# Altium PCB PCB1.PcbDoc
Units mil, origin at the board's own origin, x right, y up, seen from the top; angles counter-clockwise.
Board outline 2630.97 x 2630.97 mil, 2 copper layers (Top Layer, Bottom Layer); 25 components, 8 nets, 53 pads, 0 vias.
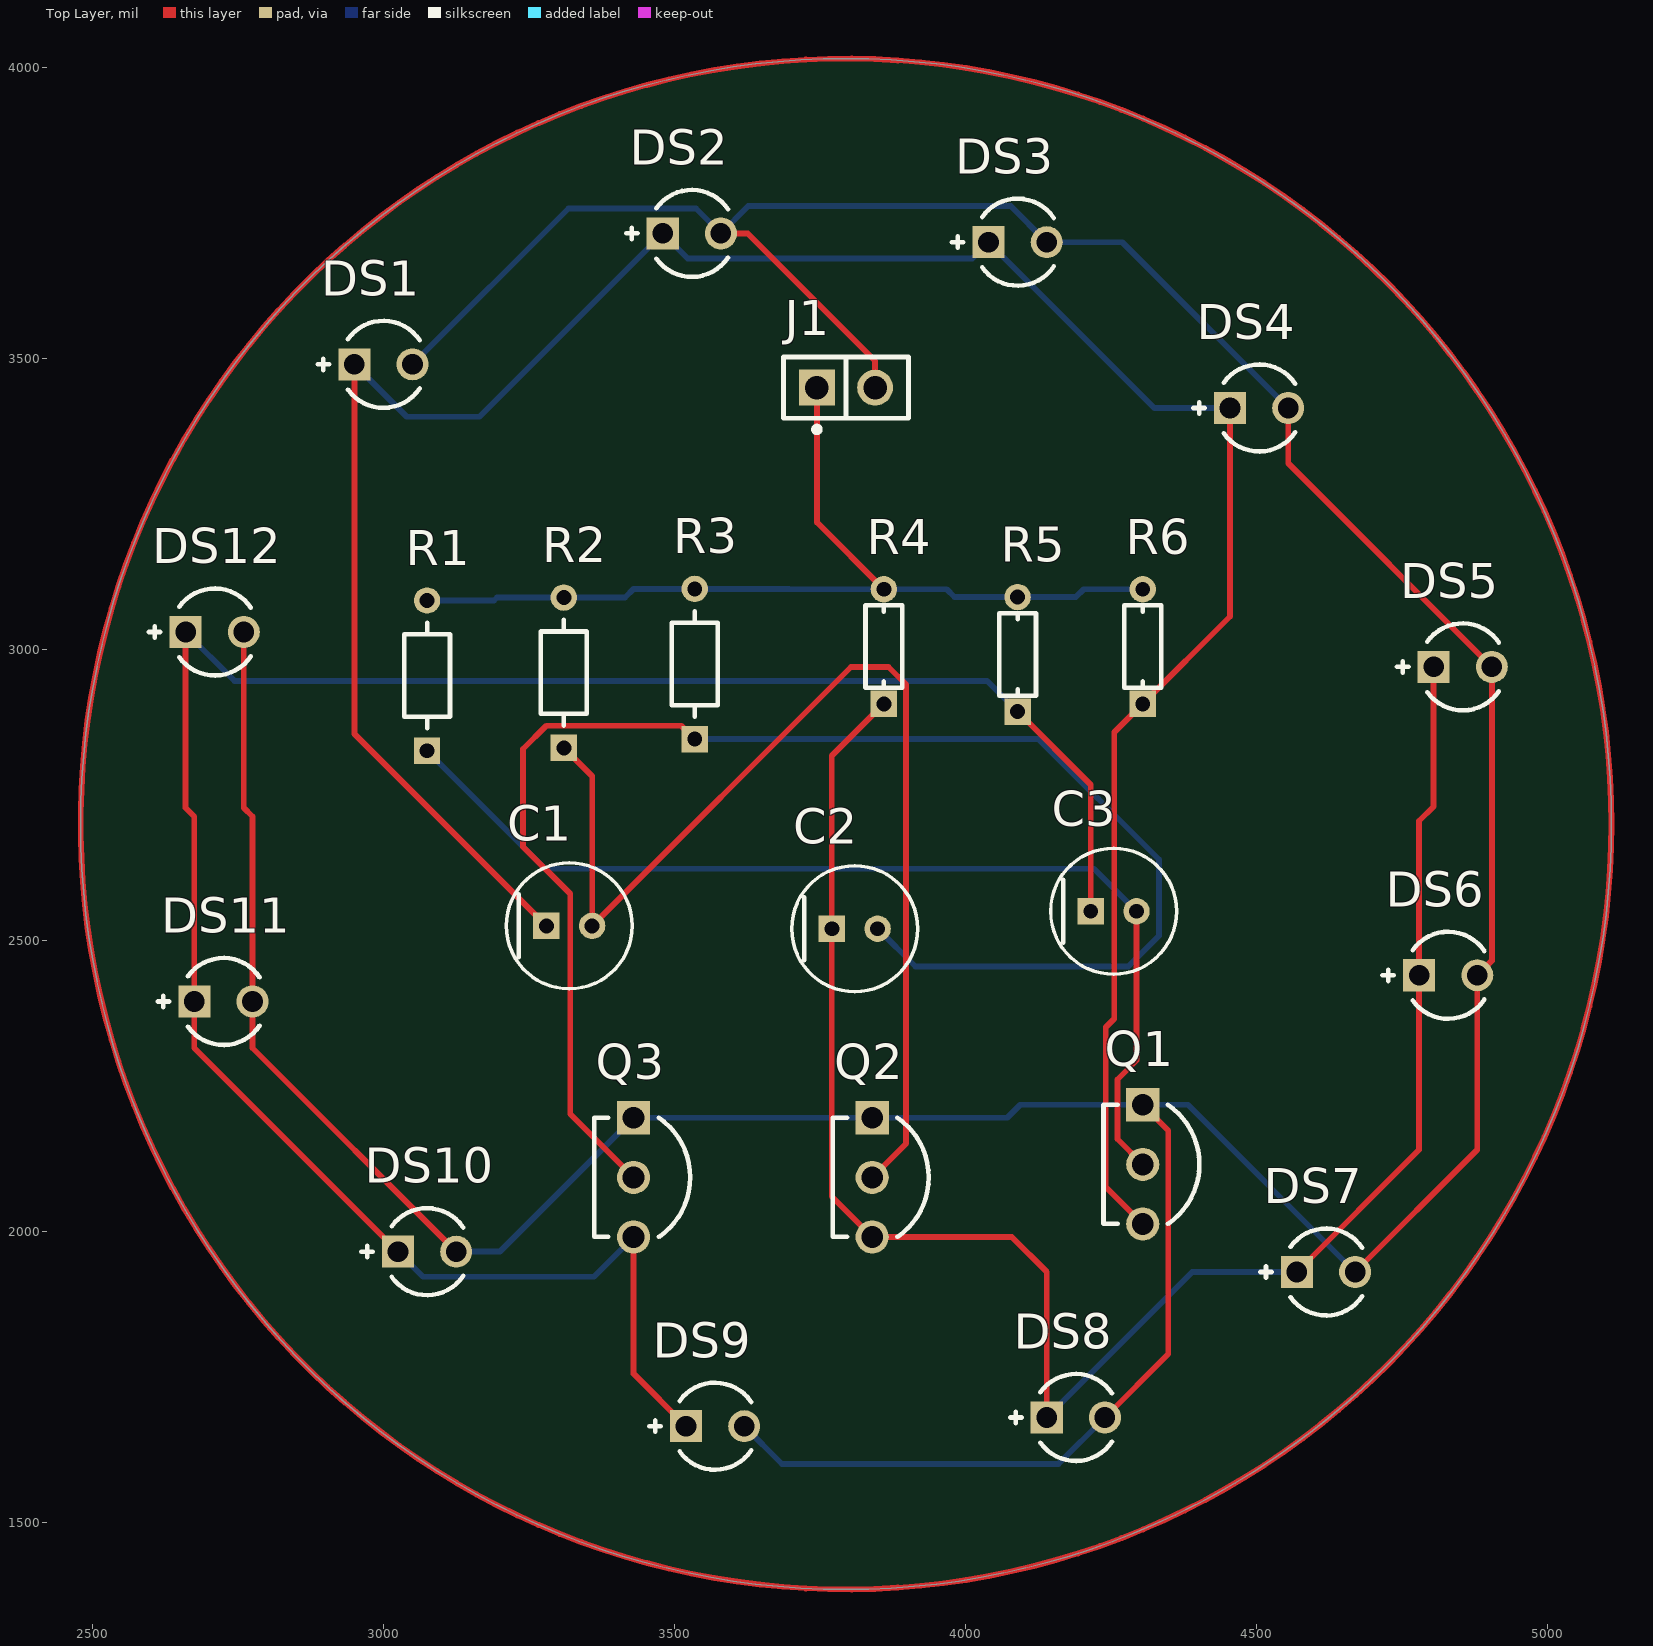
[diagram p0: Top Layer view]
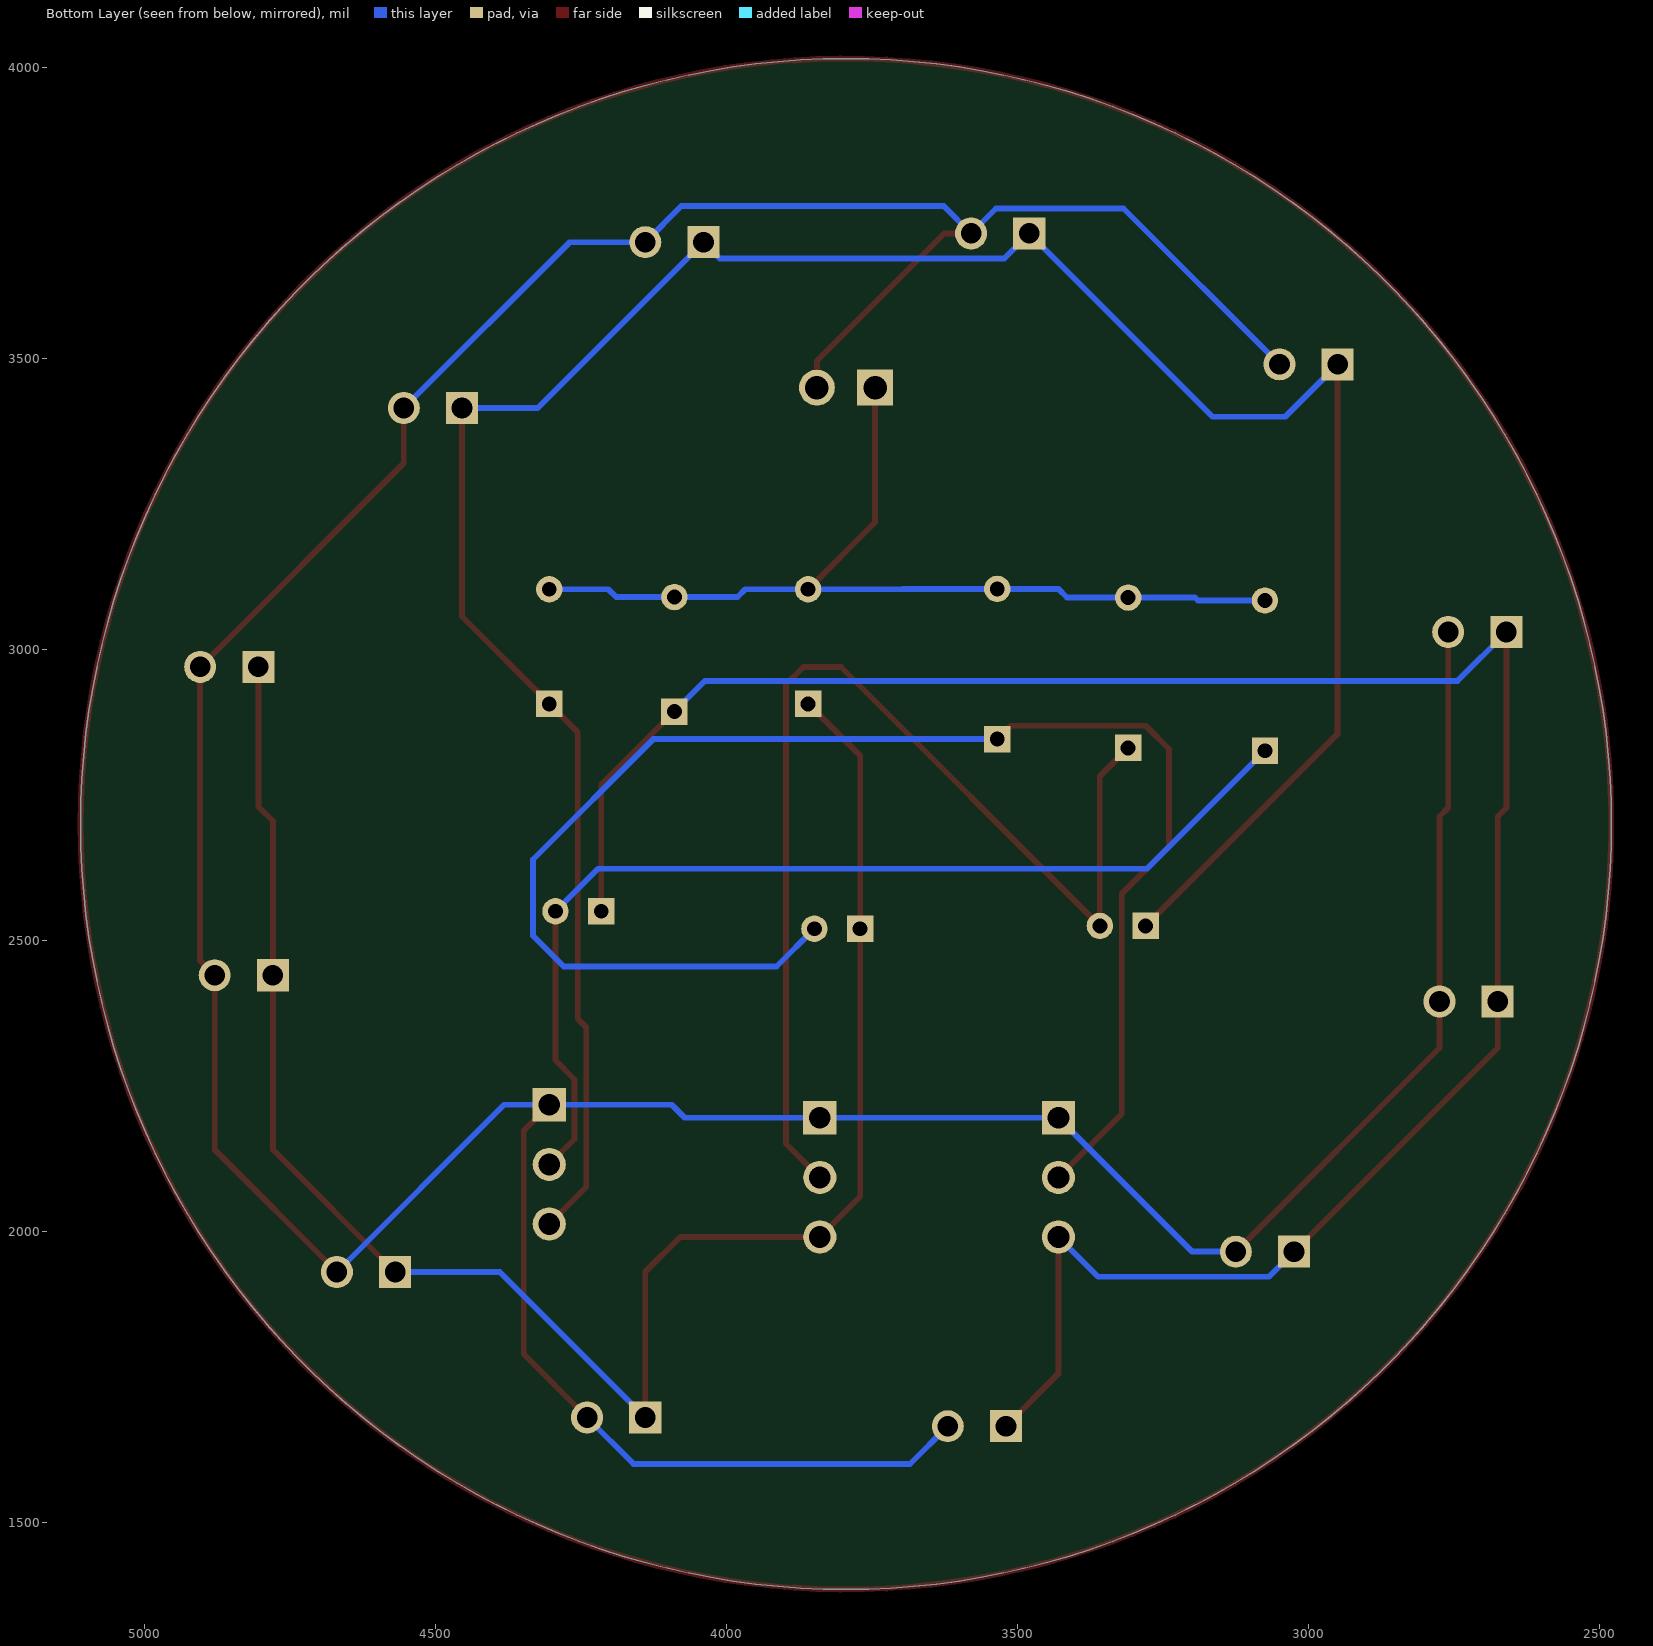
[diagram p1: Bottom Layer view, seen from below]
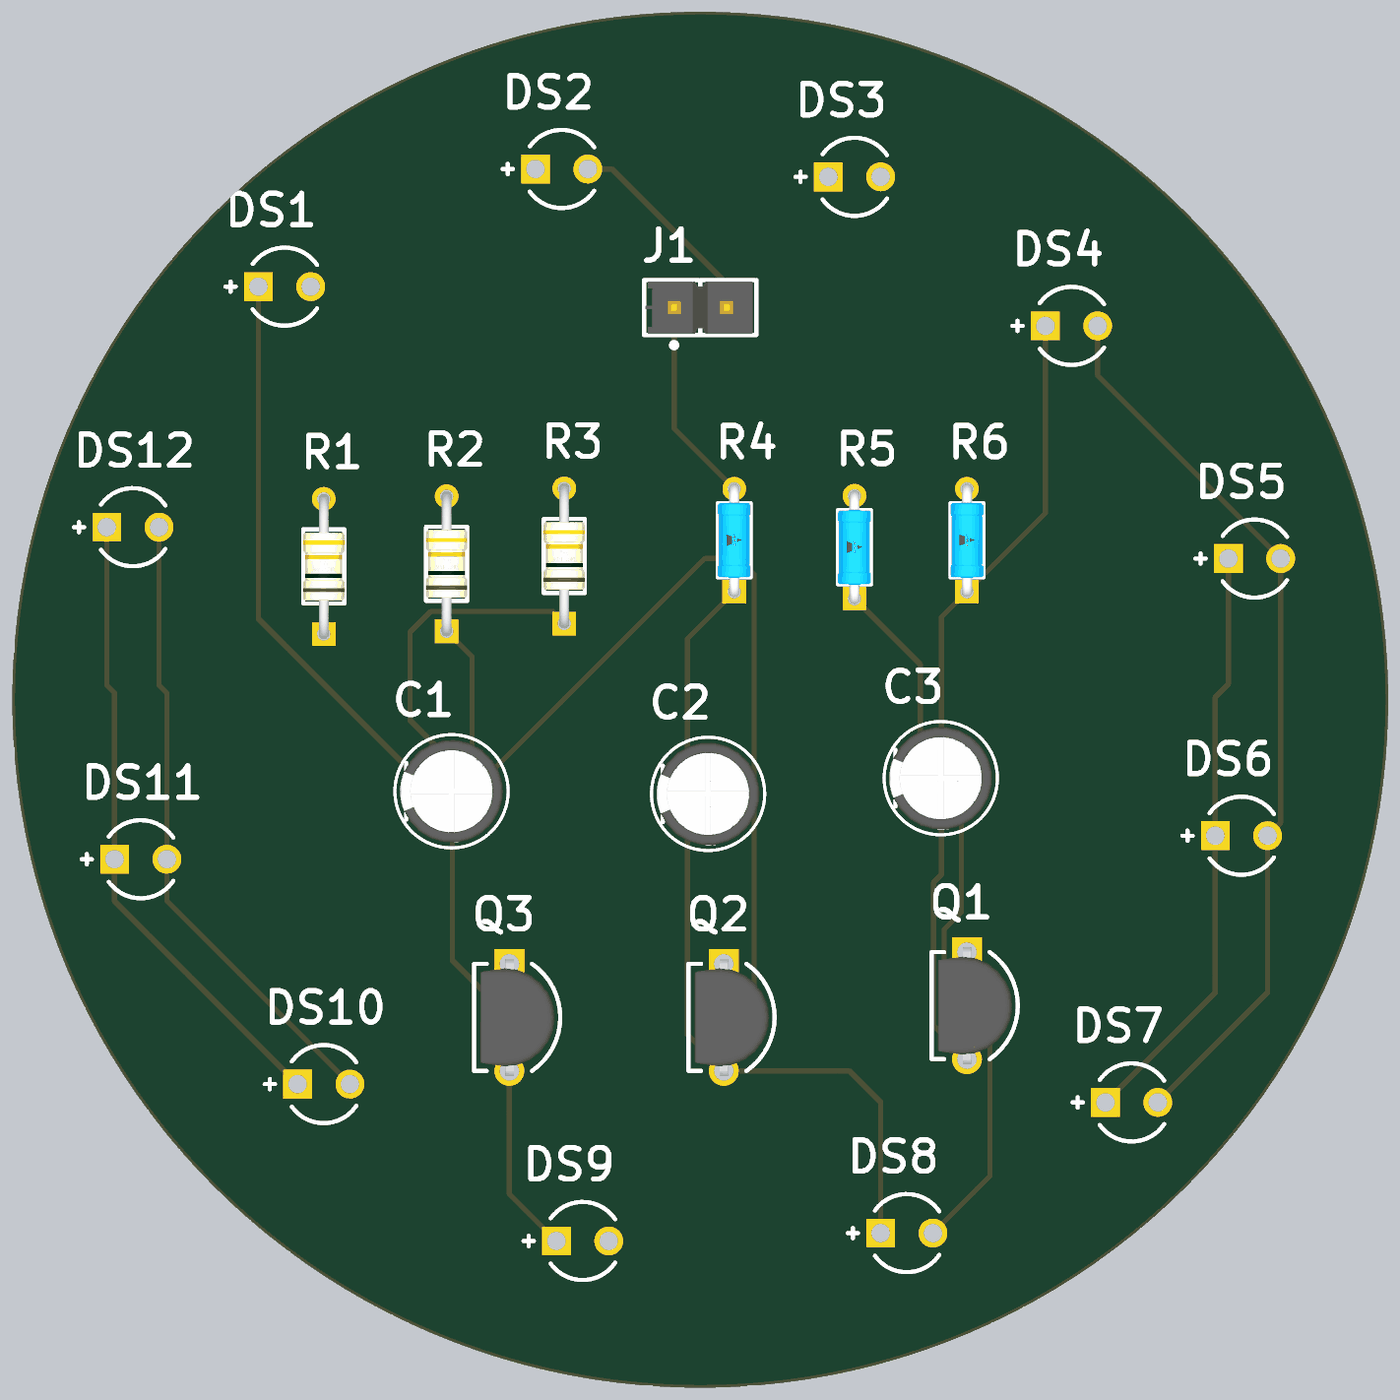
[diagram p2: 3D render of the assembled board from above, using the file's embedded part models]

## Layer stack, top to bottom
Top Solder: solder mask 0.4, Solder Resist, Dk 3.5
Top Layer: signal copper 1.4
Dielectric 1: dielectric 12.6, FR-4, Dk 4.8
Bottom Layer: signal copper 1.4
Bottom Solder: solder mask 0.4, Solder Resist, Dk 3.5

## Board outline
2479.52,2700 ccw(c3795,2700) 3795,1384.52 ccw(c3795,2700) 5110.48,2700 ccw(c3795,2700) 3795,4015.48 ccw(c3795,2700)

## Design rules (kind name [scope] priority, off if disabled: settings)
Clearance [All] p1: gap=10 ignorepadtopadclearanceinfootprint=FALSE
PolygonConnect [All] p1: connectstyle=Relief reliefconductorwidth=10 reliefentries=4 polygonreliefangle="90 Angle" airgapwidth=10
RoutingVias [All] p1: holewidth=28 width=50 viastyle="Through Hole" minholewidth=28 minwidth=50 maxholewidth=28 maxwidth=50
SolderMaskExpansion [All] p1: expansion=0 istentingtop=FALSE
SupplyNets "Schematic Supply Nets" [InNet('GND')] p1: voltage=0.000
Width [All] p1: maxlimit=10 minlimit=10 preferedwidth=10
30 further rules are at their usual default settings.

## Components (designator, comment, footprint, x,y, rotation, side; value= is the part's Value field where it differs from the comment)
C1 "EEAGA1C220" FP-RAD-TH-D_5_0_5-L_7_1-F-MFG 3319.37,2525 r0 top
C2 "EEAGA1C220" FP-RAD-TH-D_5_0_5-L_7_1-F-MFG 3810,2520 r0 top
C3 "EEAGA1C220" FP-RAD-TH-D_5_0_5-L_7_1-F-MFG 4255,2550 r0 top
DS1 "LTL-1CHE" INDPR60-254-520X380X650 3000,3490 r0 top
DS2 "LTL-1CHE" INDPR60-254-520X380X650 3530,3715 r0 top
DS3 "LTL-1CHE" INDPR60-254-520X380X650 4090,3700 r0 top
DS4 "LTL-1CHE" INDPR60-254-520X380X650 4505,3415 r0 top
DS5 "LTL-1CHE" INDPR60-254-520X380X650 4855,2970 r0 top
DS6 "LTL-1CHE" INDPR60-254-520X380X650 4830,2440 r0 top
DS7 "LTL-1CHE" INDPR60-254-520X380X650 4620,1930 r0 top
DS8 "LTL-1CHE" INDPR60-254-520X380X650 4190,1680 r0 top
DS9 "LTL-1CHE" INDPR60-254-520X380X650 3570,1665 r0 top
DS10 "LTL-1CHE" INDPR60-254-520X380X650 3075,1965 r0 top
DS11 "LTL-1CHE" INDPR60-254-520X380X650 2725,2395 r0 top
DS12 "LTL-1CHE" INDPR60-254-520X380X650 2710,3030 r0 top
J1 "TSW-102-14-G-S" FP-TSW-102-14-G-S-MFG 3795,3450 r0 top
Q1 "2N5550TFR" FP-135AR-MFG 4320,2115 r0 top
Q2 "2N5550TFR" FP-135AR-MFG 3854.96,2092.64 r0 top
Q3 "2N5550TFR" FP-135AR-MFG 3444.96,2092.64 r0 top
R1 "CF18JT10K0" FP-CF18-MFG 3075,2955 r90 top value=10kΩ
R2 "CF18JT10K0" FP-CF18-MFG 3310,2960 r90 top value=10kΩ
R3 "CF18JT10K0" FP-CF18-MFG 3535,2975 r90 top value=10kΩ
R4 "MBA02040C2200FC100" FP-MBA0204-MFG 3860,3005 r90 top value=220Ω
R5 "MBA02040C2200FC100" FP-MBA0204-MFG 4090,2991.57 r90 top value=220Ω
R6 "MBA02040C2200FC100" FP-MBA0204-MFG 4305,3005 r90 top value=220Ω

## Footprints (in the part's own frame and the unit in brackets; to place one, negate y for a bottom-side part, rotate by r counter-clockwise, add the part's x,y. Pads: shape width x height; smd on the part's side, far side on the other; paste and mask are expansions set on the pad)
FP-135AR-MFG [mm]
  rect 1.45x1.45 hole 0.95 paste-2539.97 mask+0: 1(-0.38,2.6)
  round 1.45 hole 0.95 paste-2539.97 mask+0: 2(-0.38,0) 3(-0.38,-2.6)
  silkscreen extent -2.09,-2.6 2.09,2.6, body extent -2.19,-3.42 2.19,3.42, height 0.25
FP-CF18-MFG [mm]
  rect 1.15x1.15 hole 0.65 paste-2539.97 mask+0: 1(-3.28,0)
  round 1.15 hole 0.65 paste-2539.97 mask+0: 2(3.28,0)
  silkscreen extent -2.3,-1 2.3,1, body extent -3.96,-1.1 3.96,1.1, height 0.25
FP-MBA0204-MFG [mm]
  rect 1.15x1.15 hole 0.65 paste-2539.97 mask+0: 1(-2.5,0)
  round 1.15 hole 0.65 paste-2539.97 mask+0: 2(2.5,0)
  silkscreen extent -1.8,-0.8 1.8,0.8, body extent -3.17,-0.9 3.17,0.9, height 0.25
FP-RAD-TH-D_5_0_5-L_7_1-F-MFG [mm]
  rect 1.15x1.15 hole 0.65 paste-2539.97 mask+0: 1(-1,0)
  round 1.15 hole 0.65 paste-2539.97 mask+0: 2(1,0)
  silkscreen extent -2.75,-2.75 2.75,2.75, body extent -2.85,-2.85 2.85,2.85, height 0.25
FP-TSW-102-14-G-S-MFG [mm]
  rect 1.57x1.57 hole 1.02 paste-2539.97 mask+0: 1(-1.27,0)
  round 1.57 hole 1.02 paste-2539.97 mask+0: 2(1.27,0)
  silkscreen extent -2.73,-1.95 2.73,1.34, body extent -2.83,-1.44 2.83,1.44, height 0.25
INDPR60-254-520X380X650 [mm] "THD, 2-Leads, Dia 3.8mm, Pitch 2.54mm"
  rect 1.4x1.4 hole 0.9: 1(-1.27,0)
  round 1.4 hole 0.9: 2(1.27,0)
  silkscreen extent -2.87,-1.9 1.58,1.9, body extent -1.9,-1.9 1.9,1.9, height 6.5

## Part data
C1 C2 C3: library part CMP-05427-000251-1, "Aluminum Electrolytic Capacitors (Radial Lead Type) 22uF ±20% 16V", Capacitance=22uF, Case/Package=Radial, Leakage Current=3.5uA, Max Operating Temperature=105°C, Min Operating Temperature=-55°C, Package Quantity=200, Ripple Current=50mA, Tolerance=20%, Voltage=16V, Construction=RADIAL, Diameter=5mm, Height=7mm, Height - Seated (Max)=0.276inch, Lead Diameter=0.45mm, Lead Pitch=2mm, Length=7mm, Life (Hours)=1000Hour, Mount="Through Hole", Packaging=Bulk, Polarity=Polar, Radiation Hardening=No, REACH SVHC="No SVHC", Ripple Current (AC)=50mA, RoHS Compliant=Yes, Series=GA, Termination=Radial, Voltage Rating=16V, Voltage Rating (DC)=16V
DS1 DS2 DS3 DS4 DS5 DS6 DS7 DS8 DS9 DS10 DS11 DS12: library part CMP-1674-00005-1, "Radial LED, 12.6 mcd, 20 mA, 2 V, -55 to 100 degC, 2-Pin THD, RoHS, Bulk", Case\Package=Radial, Current Rating="3.6 A", Max Operating Temperature="130 degC", Min Operating Temperature="-40 degC", Package Quantity=55, Resistance="0.045 Ohm", Tolerance=20%, ComponentLink1Description="Manufacturer URL", ComponentLink1URL=http://www.us.liteon.com/, ComponentLink2Description=Datasheet, ComponentLink2URL=https://datasheet.ciiva.com/15117/getdatasheetpartid-187746-15117985.pdf, DatasheetVersion=Dec-03, Height="1.1 inch", Lead Pitch="11.44 mm", Length="0.97 inch", Mount="Through Hole", PackageDescription="2-Pin Through Hole Device, Dia 3.8 mm, Pitch 2.54 mm", PackageReference=LTL-1CHE, Packaging=Tray, Radiation Hardening=No, RoHSCompliant=true, Shielding=Unshielded, Width="0.62 inch"
J1: library part CMP-02766-001740-1, "CONN HEADER VERT 2POS 2.54MM", Color=Black, Flammability Rating="UL94 V-0", Max Current Rating=7.6A, Max Operating Temperature=125°C, Max Voltage Rating (AC)=550V, Min Operating Temperature=-55°C, Package Quantity=1, Connector Type=Header, Contact Finish - Mating=GOLD, Contact Material=Bronze, Contact Mating Length=0.32inch, Contact Plating=Gold, Contact Shape=Square, Contact Type="Male Pin", Depth=2.54mm, Fastening Type=Pull, Gender=Male, Housing Color=Black, Housing Material=Polyester, Insulation Color=Black, Insulation Material=PBT, Lead Free="Lead Free", Length=5.08mm, Mount="Through Hole", Number of Contacts=2, Number of Positions=2, Number of Rows=1, Orientation=Straight, Packaging=Bulk, Pitch=2.54mm, Radiation Hardening=No, REACH SVHC="No SVHC", RoHS Compliant=Yes, Series=TSW, Termination=Solder, Width=2.54mm
Q1 Q2 Q3: library part CMP-00278-84408887-1, "2N5550TFR Transistor, bjt, npn, 140V V(Br)Ceo, 600Ma I(C), to-92 Rohs Compliant: Yes", Case/Package=TO-92-3, Collector Base Voltage (VCBO)=160V, Collector Emitter Breakdown Voltage=140V, Collector Emitter Saturation Voltage=250mV, Current Rating=600mA, Emitter Base Voltage (VEBO)=6V, Frequency=300MHz, Manufacturer Lifecycle Status=ACTIVE, Max Junction Temperature (Tj)=150°C, Max Power Dissipation=625mW, Min Operating Temperature=-55°C, Collector Emitter Voltage (VCEO)=140V, Element Configuration=Single, Gain Bandwidth Product=300MHz, Height=4.58mm, hFE Min=60, Lead Free="Lead Free", Length=4.58mm, Lifecycle Status=Production, Max Breakdown Voltage=140V, Max Collector Current=600mA, Max Frequency=300MHz, Max Operating Temperature=150°C, Mount="Through Hole", NexarPartId=84408887, Number of Elements=1, Number of Pins=3, Polarity=NPN, Power Dissipation=625mW, Radiation Hardening=No, RoHS=Compliant, Schedule B="8541210080, 8541210080", Transition Frequency=300MHz, Voltage Rating (DC)=140V, Weight=240mg, Width=3.86mm
R1 R2 R3: library part CMP-26528-000002-1, "RES 10K OHM 1/8W 5% CF AXIAL", Manufacturer="Stackpole Electronics", Package=CF18, Power Rating=0.125W, Resistance=10kΩ, Temperature="-55°C to +155°C", Temperature Coefficient=0-500ppm/°C, Temperature Range High=+155°C, Temperature Range Low=-55°C, Tolerance=5%, Voltage Rating=250V, Automotive=No, Category=Res, ComponentLink2Description=Datasheet, ComponentLink2URL=http://www.seielect.com/Catalog/SEI-CF_CFM.pdf, Composition="Carbon Film", Device Class L1="Passive Components", Device Class L2=Resistors, Device Class L3="Through-Hole Resistors", Digikey Description="RES 10K OHM 1/8W 5% CF AXIAL", Height=2mm, Ipc Land Pattern Name=RESAD656W65L360D200, Lead Free=Yes, Manufacturer Part Number=CF18JT10K0, Octopart=https://octopart.com/cf18jt10k0-stackpole+electronics-19205642, RoHS=TRUE, Series=CF
R4 R5 R6: library part CMP-02408-000005-1, "RES 220 OHM 0.4W 1% AXIAL", Manufacturer="Vishay BC Components", Package=MBA0204, Power Rating=0.25W, Resistance=220Ω, Temperature="-55°C to +125°C", Temperature Coefficient=50ppm/°C, Temperature Range High=+125°C, Temperature Range Low=-55°C, Tolerance=1%, Voltage Rating=200V, Automotive=Yes, Automotive Grade="Grade 1", Category=Res, ComponentLink2Description=Datasheet, ComponentLink2URL=http://www.vishay.com/docs/28766/mbxsma.pdf, Composition="Metal Film", Device Class L1="Passive Components", Device Class L2=Resistors, Device Class L3="Through-Hole Resistors", Digikey Description="RES 220 OHM 0.4W 1% AXIAL", Height=1.6mm, Ipc Land Pattern Name=RESAD500W65L360D160, Lead Free=Yes, Manufacturer Part Number=MBA02040C2200FC100, Mouser Description="Thin Film Resistors - Through Hole .4watt 220ohms 1% 1/8watt body size", Octopart=https://octopart.com/mba02040c2200fc100-vishay-43743094, RoHS=TRUE, Series="MBA/SMA 0204"

## Nets (pads, with @x,y where several pads share a name; then routed paths per layer and width w, separated by ;. In a path a pad name is that pad's centre, name@x,y a point inside that pad or via, vN(x,y) a via of type N, cw(c..) or ccw(c..) an arc to the next point about the centre after c; other vN are vias at no path point)
GND: DS1.2 DS2.2 DS3.2 DS4.2 DS5.2 DS6.2 DS7.2 DS8.2 DS9.2 DS10.2 DS11.2 DS12.2 J1.2 Q1.1 Q2.1 Q3.1 | length 8191.6
  Top Layer w10: DS12.2 2760,2728 2775,2713 DS11.2 2775,2315 DS10.2 ; DS2.2 3626,3715 3845,3496 J1.2 ; DS8.2 4349,1789 4349,2173.4 Q1.1 ; DS4.2 4555,3320 DS5.2 4905,2465 DS6.2 4880,2140 DS7.2
  Bottom Layer w10: DS1.2 3318,3758 3537,3758 DS2.2 3627,3762 4078,3762 DS3.2 4270,3700 DS4.2 ; DS10.2 3200,1965 Q3.1 Q2.1 4072,2195 4094.36,2217.36 Q1.1 4382.64,2217.36 DS7.2 ; DS9.2 3685,1600 4160,1600 DS8.2
NetC1_1: C1.1 DS1.1 DS2.1 DS3.1 DS4.1 Q1.3 R6.1 | length 4439
  Top Layer w10: DS1.1 2950,2855 C1.1 ; Q1.3 4241.5,2076.18 4241.5,2350.69 4256,2365.19 4256,2857.57 R6.1 4455,3056.57 DS4.1
  Bottom Layer w10: DS1.1 3040,3400 3165,3400 DS2.1 3523,3672 4012,3672 DS3.1 4325,3415 DS4.1
NetC1_2: C1.2 Q2.2 R2.1 | length 1933.5
  Top Layer w10: R2.1 3358.74,2782.13 C1.2 3803.74,2970 3868,2970 3898,2940 3898,2150.64 Q2.2
NetC2_1: C2.1 DS5.1 DS6.1 DS7.1 DS8.1 Q2.3 R4.1 | length 3228.1
  Top Layer w10: R4.1 3770.63,2817.2 C2.1 3770.63,2059.65 Q2.3 4080,1990.28 4140,1930.28 DS8.1 ; DS7.1 4780,2140 DS6.1 4780,2705 4805,2730 DS5.1
  Bottom Layer w10: DS8.1 4390,1930 DS7.1
NetC2_2: C2.2 Q3.2 R3.1 | length 2683.4
  Top Layer w10: Q3.2 3321,2201.64 3321,2580 3240,2661 3240,2829 3280,2869 3511.87,2869 R3.1
  Bottom Layer w10: R3.1 4126.13,2845.87 4333,2639 4333,2508 4280,2455 3914.37,2455 C2.2
NetC3_1: C3.1 DS9.1 DS10.1 DS11.1 DS12.1 Q3.3 R5.1 | length 3911.7
  Top Layer w10: DS12.1 2660,2728 2675,2713 DS11.1 2675,2315 DS10.1 ; Q3.3 3430,1755 DS9.1 ; R5.1@4090,2893.15 4215.63,2767.52 C3.1
  Bottom Layer w10: DS12.1 2744,2946 4037.15,2946 R5.1@4090,2893.15 ; DS10.1 3068,1922 3361.72,1922 Q3.3
NetC3_2: C3.2 Q1.2 R1.1 | length 1800.3
  Top Layer w10: C3.2 4294.37,2293.87 4261.5,2261 4261.5,2158.54 Q1.2
  Bottom Layer w10: R1.1 3277.87,2623 4221.37,2623 C3.2
NetJ1_1: J1.1 R1.2 R2.2 R3.2 R4.2 R5.2 R6.2 | length 1643.9
  Top Layer w10: J1.1 3745,3218.43 R4.2
  Bottom Layer w10: R1.2 3190,3084.13 3195,3089.13 R2.2 3415,3089.13 3430,3104.13 R3.2 3697,3104.13 3697.71,3103.43 R4.2 3968,3103.43 3981.43,3090 R5.2 4190,3090 4203.43,3103.43 R6.2
copper on no net: | length 8265.4
  Top Layer w10: 5110.48,2700 ccw(c3795,2700) 5110.48,2700